# Altium PCB DCDC.PcbDoc
Units mm, origin at the board's own origin, x right, y up, seen from the top; angles counter-clockwise.
Board outline 45 x 35 mm, 2 copper layers (Top Layer, Bottom Layer); 33 components, 13 nets, 74 pads, 31 vias.
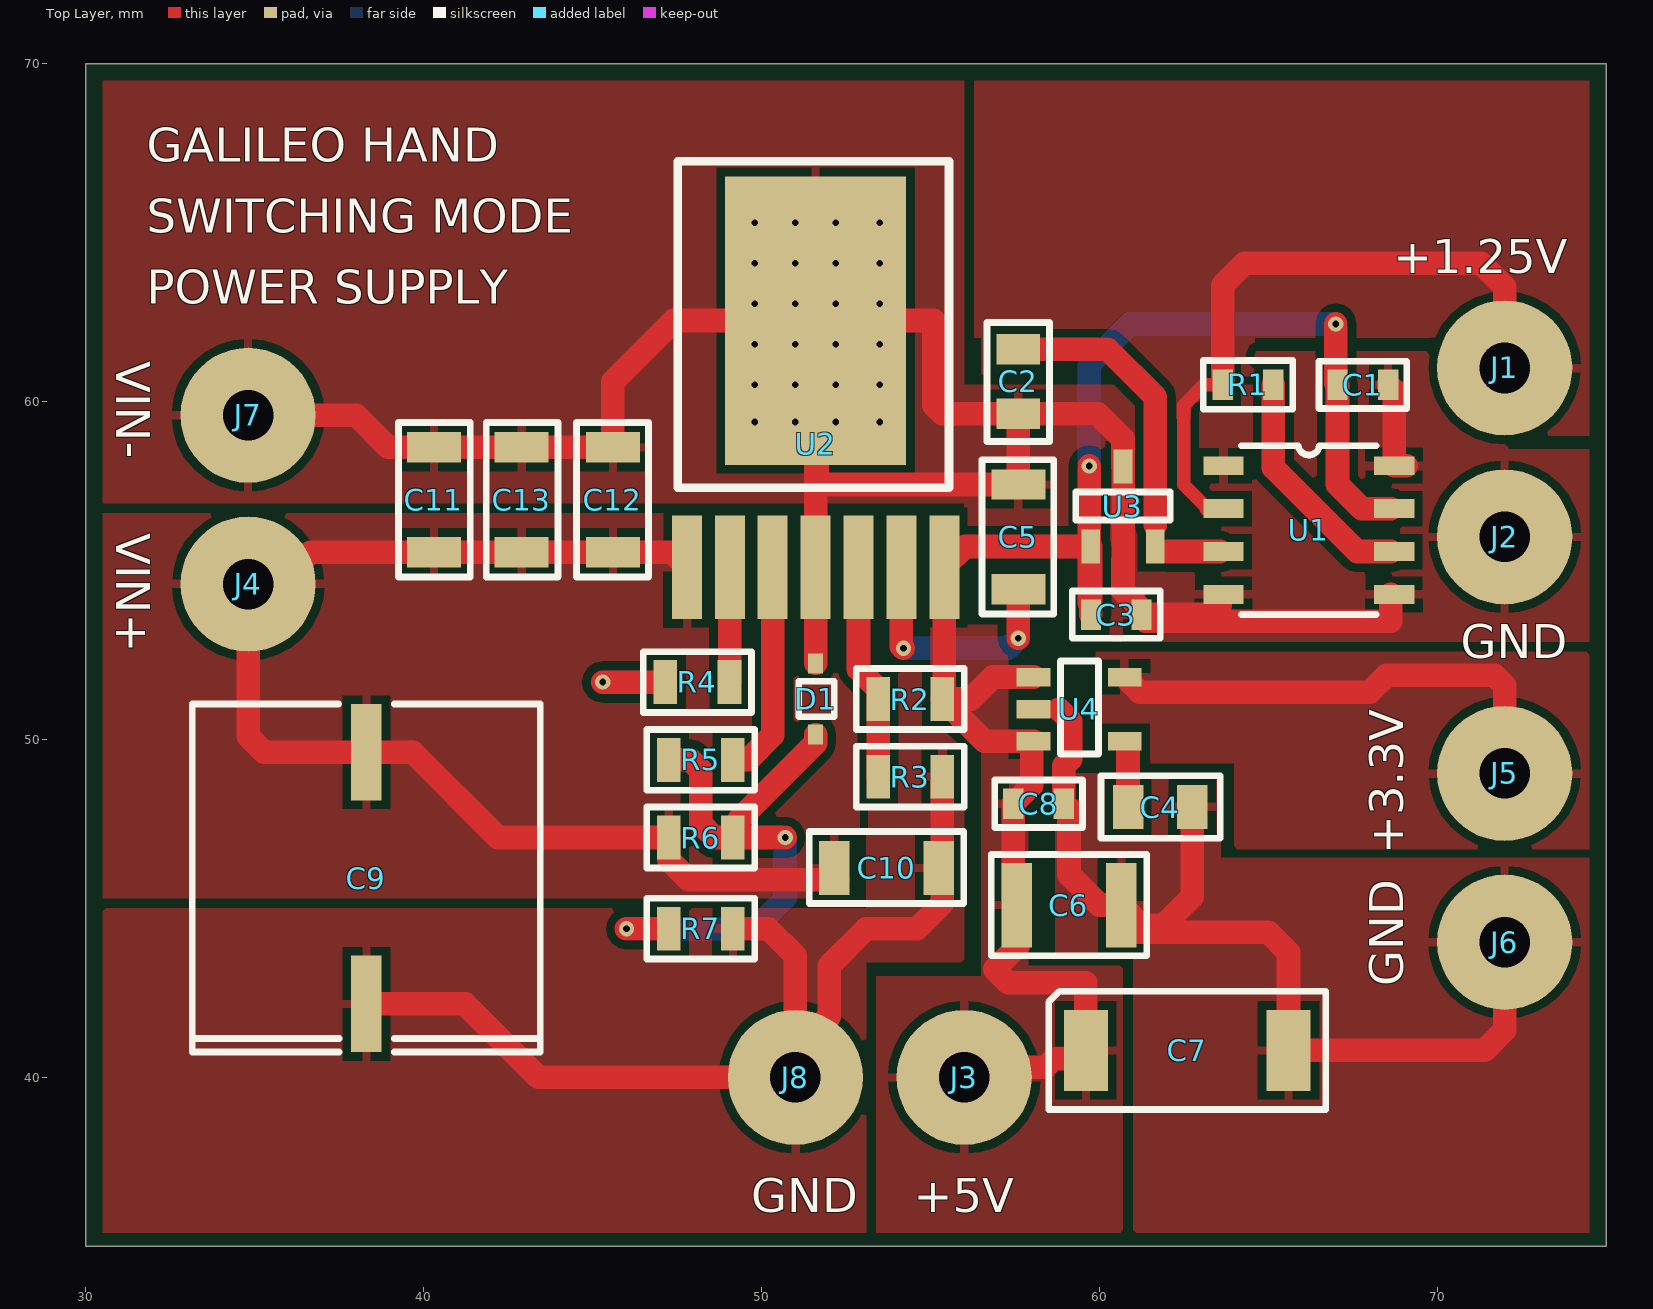
[diagram p0: Top Layer view]
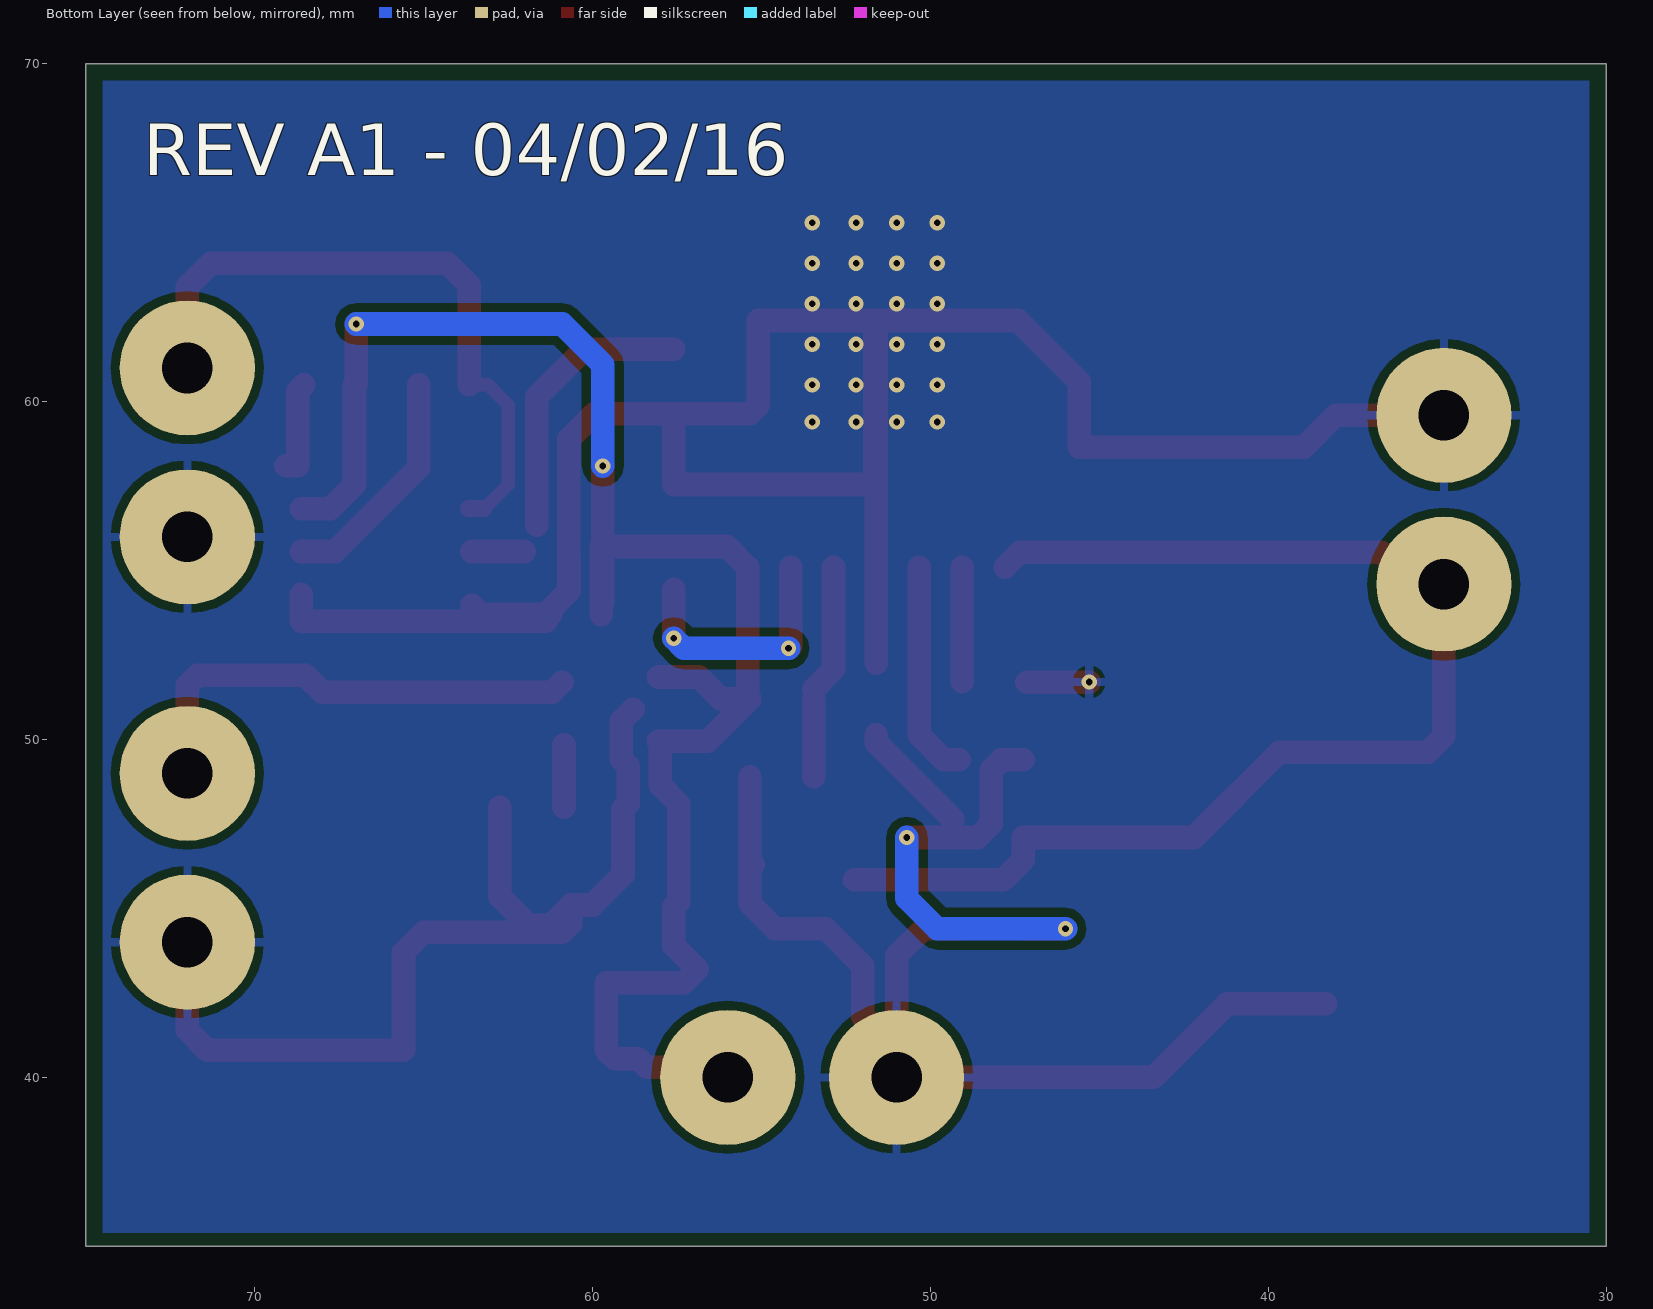
[diagram p1: Bottom Layer view, seen from below]

## Layer stack, top to bottom
Top Solder: solder mask 0.0102, Solder Resist, Dk 3.5
Top Layer: signal copper 0.0356
Dielectric 1: dielectric 0.32, FR-4, Dk 4.8
Bottom Layer: signal copper 0.0356
Bottom Solder: solder mask 0.0102, Solder Resist, Dk 3.5

## Board outline
30,35 75,35 75,70 30,70

## Design rules (kind name [scope] priority, off if disabled: settings)
Clearance [All] p1: gap=0.254
HoleToHoleClearance [All] p1: gap=0.1 allowstackedmicrovias=TRUE
MinimumSolderMaskSliver [All] p1: minsoldermaskwidth=0.1
PolygonConnect [All] p1: connectstyle=Relief reliefconductorwidth=0.254 reliefentries=4 polygonreliefangle="90 Angle" airgapwidth=0.254
RoutingVias [All] p1: holewidth=0.711 width=1.27 viastyle="Through Hole" minholewidth=0.711 minwidth=1.27 maxholewidth=0.711 maxwidth=1.27
SilkToSilkClearance [All] p1: silktosilkclearance=0.1
SilkToSolderMaskClearance [IsPad] p1: minsilkscreentomaskgap=0.1 clearancetoexposedcopper=TRUE
SolderMaskExpansion [All] p1: expansion=0.102
Width [All] p1: maxlimit=0.7 minlimit=0.254 preferedwidth=0.254
26 further rules are at their usual default settings.

## Components (designator, comment, footprint, x,y, rotation, side; value= is the part's Value field where it differs from the comment)
C1 "100nF" C0603 67.8,60.5 r180 top
C2 "10nF" C0805 57.6,60.6 r90 top
C3 "1uF" C0603 60.5,53.7 r180 top
C4 "10nF" C0805 61.8,48 r180 top
C5 "0.047uF" C1206 57.6,56 r90 top
C6 "100uF" C1210 59.1,45.1 r0 top
C7 "220uF" EEF-UE 62.6,40.8 r0 top
C8 "1uF" C0603 58.2,48.1 r180 top
C9 "150uF" FK-G 38.3,45.9 r270 top
C10 "0.047uF" C1206 53.7,46.2 r0 top
C11 "10uF" C1206 40.3,57.1 r270 top
C12 "0.047uF" C1206 45.6,57.1 r90 top
C13 "10uF" C1206 42.9,57.1 r270 top
D1 "MMSZ5231BS-7-F" SOD323 51.6,51.2 r270 top
J1 "PAD_4mmx1.5mm_Hole" PAD_WITH_HOLE_4x1mm 72,61 r0 top
J2 "PAD_4mmx1.5mm_Hole" PAD_WITH_HOLE_4x1mm 72,56 r0 top
J3 "PAD_4mmx1.5mm_Hole" PAD_WITH_HOLE_4x1mm 56,40 r0 top
J4 "PAD_4mmx1.5mm_Hole" PAD_WITH_HOLE_4x1mm 34.8,54.6 r0 top
J5 "PAD_4mmx1.5mm_Hole" PAD_WITH_HOLE_4x1mm 72,49 r0 top
J6 "PAD_4mmx1.5mm_Hole" PAD_WITH_HOLE_4x1mm 72,44 r0 top
J7 "PAD_4mmx1.5mm_Hole" PAD_WITH_HOLE_4x1mm 34.8,59.6 r0 top
J8 "PAD_4mmx1.5mm_Hole" PAD_WITH_HOLE_4x1mm 51,40 r0 top
R1 "100" R0603 64.4,60.5 r0 top
R2 "5.62k" R0805 54.4,51.2 r0 top
R3 "1.07k" R0805 54.4,48.9 r180 top
R4 "1.5k" R0805 48.1,51.7 r0 top
R5 "100" R0805 48.2,49.4 r0 top
R6 "42.2k" R0805 48.2,47.1 r0 top
R7 "12.7k" R0805 48.2,44.4 r0 top
U1 "OPA335AIDR" SO-8 66.2,56.2 r0 top
U2 "LMZ22005TZE/NOPB" NDW0007A 51.6,55.1 r0 top
U3 "REF3112AIDBZR" SOT-23 60.7,56.9 r270 top
U4 "TPS73633DBVR" SOT23-5 59.4,50.9 r0 top

## Footprints (in the part's own frame and the unit in brackets; to place one, negate y for a bottom-side part, rotate by r counter-clockwise, add the part's x,y. Pads: shape width x height; smd on the part's side, far side on the other; paste and mask are expansions set on the pad)
C0603 [mm]
  rect 0.6x0.9 smd: 1(-0.75,0) 2(0.75,0)
  silkscreen extent -1.3,-0.7 1.3,0.7
C0805 [mm]
  rect 0.9x1.3 smd: 1(-0.95,0) 2(0.95,0)
  silkscreen extent -1.78,-0.92 1.75,0.92
C1206 [mm]
  rect 0.9x1.6 smd: 1(-1.55,0) 2(1.55,0)
  silkscreen extent -2.29,-1.05 2.29,1.07
C1210 [mm]
  rect 0.9x2.5 smd: 1(-1.55,0) 2(1.55,0)
  silkscreen extent -2.3,-1.5 2.3,1.5
EEF-UE [mm]
  rect 1.3x2.4 smd: 1(-3,0) 2(3,0)
  silkscreen extent -4.1,-1.75 4.1,1.75
FK-G [mm]
  rect 2.85x0.9 smd: 1(-3.725,0) 2(3.725,0)
  silkscreen extent -5.15,-5.15 5.15,5.15
NDW0007A [mm]
  rect 0.89x3.06 smd: 1(-3.81,0) 2(-2.54,0) 3(-1.27,0) 4(0,0) 5(1.27,0) 6(2.54,0) 7(3.81,0)
  rect 5.35x8.54 smd: 8(0,7.305)
  silkscreen extent -4.08,2.35 3.95,12.03
PAD_WITH_HOLE_4x1mm [mm]
  round 4 hole 1.5: 1(0,0)
R0603 [mm]
  rect 0.6x0.9 smd: 1(-0.75,0) 2(0.75,0)
  silkscreen extent -1.33,-0.72 1.33,0.72
R0805 [mm]
  rect 0.7x1.3 smd: 1(-0.95,0) 2(0.95,0)
  silkscreen extent -1.6,-0.9 1.6,0.9
SO-8 [mm]
  rect 1.194x0.559 smd: 1(-2.527,1.905) 2(-2.527,0.635) 3(-2.527,-0.635) 4(-2.527,-1.905) 5(2.527,-1.905) 6(2.527,-0.635) 7(2.527,0.635) 8(2.527,1.905)
  silkscreen extent -2,-2.5 2,2.5
SOD323 [mm]
  rect 0.59x0.45 smd: 1(-1.055,0) 2(1.055,0)
  silkscreen extent -0.53,-0.5 0.53,0.55
SOT23-5 [mm]
  rect 1x0.55 smd: 1(-1.35,0.95) 2(-1.35,0) 3(-1.35,-0.95) 4(1.35,-0.95) 5(1.35,0.95)
  silkscreen extent -0.55,-1.33 0.58,1.43
SOT-23 [mm]
  rect 1x0.55 smd mask+0.07: 1(1.185,-0.95) 2(1.185,0.95) 3(-1.185,0)
  silkscreen extent -0.43,-1.4 0.4,1.4

## Part data
C1: library part GRM188R71E104KA01D, "CAP CER 0.1UF 25V X7R 0603"
C2 C4: library part GRM216R71H103KA01D, "CAP CER 10000PF 50V X7R 0805"
C3 C8: library part GRM188R61E105KA12D, "CAP CER 1UF 25V X5R 0603"
C5 C10 C12: library part C1206C474K5RACTU, "CAP CER 0.47UF 50V X7R 1206"
C6: library part C3225X5R0J107M250AC, "CAP CER 100UF 6.3V X5R 1210"
C7: library part EEF-UE0J221LR, "CAP POLYMER 220UF 20% 6.3V SMD"
C9: library part EEE-FK1H151P, "CAP ALUM 150UF 20% 50V SMD"
C11 C13: library part GRM31CR61H106KA12L, "CAP CER 10UF 50V X5R 1206"
D1: "DIODE ZENER 5.1V 200MW SOD323"
J1 J2 J3 J4 J5 J6 J7 J8: "Pad 4mm x 1.5mm with hole"
R1: library part ERJ-3EKF1000V, "RES SMD 100 OHM 1% 1/10W 0603"
R2: library part CRCW08055K62FKEAHP, "RES SMD 5.62K OHM 1% 1/3W 0805"
R3: library part ERJ-6ENF1071V, "RES SMD 1.07K OHM 1% 1/8W 0805"
R4: library part ERJ-6ENF1501V, "RES SMD 1.5K OHM 1% 1/8W 0805"
R5: library part RCA0805100RFKEA, "RES SMD 100 OHM 1% 1/8W 0805"
R6: library part ERJ-6ENF4222V, "RES SMD 42.2K OHM 1% 1/8W 0805"
R7: library part ERJ-6ENF1272V, "RES SMD 12.7K OHM 1% 1/8W 0805"
U1: "IC OPAMP CHOPPER 2MHZ RRO 8SOIC"
U2: "IC BUCK SYNC 20V 5A TO-PMOD-7"
U3: "IC VREF SERIES 1.25V SOT23-3"
U4: "IC REG LDO 3.3V 0.4A SOT23-5"

## Via types
v1: diameter 0.45, hole 0.2, Top Layer to Bottom Layer, 31 vias

## Nets (pads, with @x,y where several pads share a name; then routed paths per layer and width w, separated by ;. In a path a pad name is that pad's centre, name@x,y a point inside that pad or via, vN(x,y) a via of type N, cw(c..) or ccw(c..) an arc to the next point about the centre after c; other vN are vias at no path point)
+1V25: J1.1 R1.1 U1.2 | length 19.5
  Top Layer w0.4: U1.2@63.212,56.835 62.5,57.547 62.5,59.9 63.1,60.5 R1.1
  Top Layer w0.5: U1.2@63.212,56.835 U1.2
  Top Layer w0.7: R1.1 63.65,63.45 64.3,64.1 71.3,64.1 72,63.4 J1.1
+3V3: J5.1 U4.5 | length 14.2
  Top Layer w0.7: U4.5@60.9,51.7 61.2,51.4 68,51.4 68.5,51.9 71.7,51.9 72,51.6 J5.1
+5V/5A: C1.2 C3.2 C6.1 C7.1 C8.2 J3.1 R2.2 U1.7 U2.7 U3.1 U4.1 U4.3 | length 54.4
  Top Layer w0.7: J3.1 56.3,40.3 58.4,40.3 58.65,40.55 59.35,40.55 C7.1 59.6,42.8 57.3,42.8 56.9,43.2 57.6,43.9 57.6,45.05 57.45,45.2 C8.2 57.996,48.646 57.996,49.896 U4.3 56.6,49.95 R2.2 ; U4.1 56.85,51.85 56.2,51.2 R2.2 ; v1(59.7,58.1) U3.1@59.7,55.715 ; C3.2 59.75,54.001 C3.2@59.746,54.005 ; v1(67,62.3) 67,60.55 C1.2 67.05,57.55 67.765,56.835 U1.7@68.627,56.835 ; R2.2 55.41,51.26 U2.7 56.025,55.715 U3.1@59.7,55.715 ; U3.1@59.7,55.715 U3.1 59.746,55.711 C3.2@59.746,54.005 ; U3.1@59.7,55.715 59.7,54.051 C3.2@59.746,54.005
  Bottom Layer w0.7: v1(59.7,58.1) 59.7,61.1 60.9,62.3 v1(67,62.3)
GND: C1.1 C2.1 C3.1 C4.1 C5.2 C6.2 C7.2 C8.1 C9.2 C10.2 C11.1 C12.2 C13.1 D1.1 J2.1 J6.1 J7.1 J8.1 R3.1 R4.1 R7.2 U1.1 U1.4 U1.5 U1.8 U2.4 U2.8 U3.3 U4.2 | length 137.6
  Top Layer w0.7: J7.1 38,59.6 38.95,58.65 C11.1 C13.1 C12.2 45.6,60.6 47.405,62.405 U2.8 ; C9.2 41.225,42.175 43.4,40 J8.1 J8.1@51,40.8 ; v1(45.3,51.7) R4.1 ; R7.2 50.2,44.4 51,43.6 J8.1@51,40.8 ; D1.1 U2.4 U2.8 ; C10.2@55.25,46.3 C10.2@55.35,46.4 ; R3.1 C10.2@55.35,46.4 ; 58.8,50.9 59.154,50.546 59.154,49.425 58.95,49.221 C8.1 59.1,47.95 59.1,46 60,45.1 C6.2 ; C3.1@61.377,53.5 68.627,53.5 U1.5@68.627,54.295 ; C4.1 62.75,45.35 61.9,44.5 61.25,44.5 C6.2 ; 63.573,53.973 63.3,53.7 C3.1 61.25,53.85 60.7,54.4 60.7,55.316 60.704,55.32 60.704,58.081 U3.3 60.7,58.9 59.95,59.65 C2.1 ; C1.1 68.727,60.323 U1.8 U1.8@69.088,58.105 ; J2.1@70.732,56 J2.1 ; J6.1 72,41.4 71.4,40.8 C7.2 65.6,43.7 65,44.3 60.9,44.3 60.65,44.55 C6.2 ; J8.1@51,40.8 52,41.8 52,43.3 53.1,44.4 54.6,44.4 55.35,45.15 C10.2@55.35,46.4 ; U2.8 55.095,62.405 55.095,59.905 55.35,59.65 C2.1 ; U2.8 51.65,62.355 51.65,57.55 C5.2 C2.1
  other v1: 49.8,59.4 51,59.4 52.2,59.4 53.5,59.4 49.8,60.5 51,60.5 52.2,60.5 53.5,60.5 49.8,61.7 51,61.7 52.2,61.7 53.5,61.7 49.8,62.9 51,62.9 52.2,62.9 53.5,62.9 49.8,64.1 51,64.1 52.2,64.1 53.5,64.1 49.8,65.3 51,65.3 52.2,65.3 53.5,65.3
NetC2_2: C2.2 U1.3 U3.2 | length 10
  Top Layer w0.7: C2.2 60.25,61.55 61.658,60.142 61.658,56.342 ; 62.023,55.565 U1.3@63.573,55.565
NetC4_2: C4.2 U4.4 | length 1.9
  Top Layer w0.7: C4.2 U4.4@60.85,49.85
NetC5_1: C5.1 U2.6 | length 7.4
  Top Layer w0.7: U2.6 54.14,52.76 v1(54.2,52.7) ; v1(57.6,53) C5.1
  Bottom Layer w0.7: v1(54.2,52.7) 57.3,52.7 v1(57.6,53)
NetD1_2: D1.2 R5.1 R6.2 R7.1 | length 16.9
  Top Layer w0.7: v1(46,44.4) R7.1 ; R5.1 47.9,49.4 48.196,49.104 48.196,48.5 48.204,48.492 48.204,47.496 48.6,47.1 R6.2 v1(50.7,47.1) ; R6.2@49.335,47.635 51.6,49.9 D1.2
  Bottom Layer w0.7: v1(46,44.4) 49.8,44.4 50.7,45.3 v1(50.7,47.1)
NetR1_2: R1.2 U1.6 | length 7
  Top Layer w0.7: R1.2 65.15,58.05 67.635,55.565 U1.6@68.627,55.565
NetR2_1: R2.1 R3.2 U2.5 | length 6.1
  Top Layer w0.7: U2.5 52.87,52.08 R2.1@53.45,51.5 ; R3.2 R2.1
NetR4_2: R4.2 U2.2 | length 3.4
  Top Layer w0.7: R4.2@49.06,51.71 U2.2
NetR5_2: R5.2 U2.3 | length 6.5
  Top Layer w0.7: R5.2 49.6,49.4 50.33,50.13 U2.3
VIN: C9.1 C10.1 C11.2 C12.1 C13.2 J4.1 R6.1 U2.1 | length 37.7
  Top Layer w0.7: U2.1 47.34,55.55 C12.1 C13.2 C11.2 36.65,55.55 35.7,54.6 J4.1 34.8,50.1 35.275,49.625 C9.1 39.675,49.625 42.2,47.1 R6.1 47.25,46.45 47.854,45.846 C10.1@52.25,45.846

## Polygon pours and split planes (outlines as drawn)
+1V25 on Top Layer "GND" (solid, pour order 28): 56.5,63.252 56.5,59.65 56.65,59.5 64.6,59.5 64.6,63.2 64.579,63.221 56.5,63.221
+1V25 on Top Layer "GND" (solid, pour order 26): 56.3,69.5 74.5,69.5 74.5,59 70,59 69.8,59 69.8,61.9 56.3,61.9
GND on Top Layer "GND" (solid, pour order 24): 56,60.5 62.2,60.5 64.6,60.5 64.6,61.4 64.5,61.5 72.1,61.5 72.1,58.6 74.5,58.6 74.5,52.9 56,52.9
+3V3 on Top Layer "GND" (solid, pour order 22): 74.5,52.6 74.5,46.7 64,46.7 64,49.3 59.9,49.3 59.9,52.6
GND on Top Layer "GND" (solid, pour order 20): 69.5,46.5 74.5,46.5 74.5,35.4 61,35.4 61,43.5 60.9,43.6 58.7,43.6 58.7,49.3 59,49 63.6,49 63.6,46.5 69.6,46.5
+5V/5A on Top Layer "GND" (solid, pour order 18): 53.4,43 56.5,43 56.5,50.4 56.3,50.6 55,50.6 55,53.4 57.9,53.4 57.9,43.3 60.7,43.3 60.7,35.5 60.8,35.4 53.5,35.4 53.4,35.4
GND on Top Layer "GND" (solid, pour order 16): 30.5,45 53.1,45 53.1,51 54.1,52 56,52 56,43.4 53.1,43.4 53.1,35.4 30.5,35.4
VIN on Top Layer "GND" (solid, pour order 14): 48.5,56.7 30.5,56.7 30.5,45.3 52.9,45.3 52.9,56.7 48.4,56.7
GND on Top Layer "GND" (solid, pour order 4): 30.5,57 56,57 56,69.5 30.5,69.5
GND on Bottom Layer "GND" (solid, pour order 12): 30.5,69.5 74.5,69.5 74.5,35.4 30.5,35.4 30.5,69.5

## Silkscreen, mask and mechanical layers (free items; w line width, h text height)
Top Overlay:
  text "GALILEO HAND" at 31.8,67.1 h1
  text "SWITCHING MODE" at 31.8,65 h1
  text "+1.25V" at 68.7,63.8 h1
  text "POWER SUPPLY" at 31.8,62.9 h1
  text "VIN-" at 30.9,61.2 h1 r270
  text "VIN+" at 30.9,56.1 h1 r270
  text "GND" at 70.7,52.4 h1
  text "+3.3V" at 69,46.6 h1 r90
  text "GND" at 69,42.7 h1 r90
  text "GND" at 49.7,36 h1
  text "+5V" at 54.5,36 h1
Bottom Overlay:
  text "REV A1 - 04/02/16" at 73.3,66.7 h1.52
Board Outline:
  lines w0.254: 30,35 30,70 75,70 ; 30,35 30,35 ; 30,35 75,35 ; 75,35 75,35 ; 75,35 75,70 ; 75,70 75,70